# EAGLE board Lid (EAGLE 9.6.2)

Size 62.52 x 88.87 mm. Coordinates in mm from the lower left corner, seen from the top.
Copper layers (1*16): Top 0.035mm / dielectric 1.5mm / Bottom 0.035mm
Design rules "SparkFun-2-layer-TIGHT": minimum track width 7mil, minimum drill 15mil, track to track 7mil, track to pad 7mil, pad to pad 7mil, via to via 7mil, smd to smd 7mil, copper to edge 7mil, drill to drill 7mil, minimum pad ring 7mil, minimum via ring 7mil, stop-mask expansion 4mil, vias tented up to drill 25mil, thermal gap 10mil
Net classes: 0 default: width 0.178 mm; 1 vcc: width 0.203 mm

## Placement (x,y rotation side)
E$1  [CAN_DIA]  31.57,42.54 12 top
E$2  [MICRO_SERVO]  17.32,79.15 12 top
E$3  [LID_THICKNESS_060]  86.15,9.52 90 top  (outside the outline)
E$4  [CLAMP_&_HINGE]  31.54,42.55 0 top
E$5  [FLAP]  31.54,42.55 0 top
E$7  [LID_THICKNESS_060]  41.19,9.52 0 top
E$8  [LID_THICKNESS_060]  21.89,9.52 180 top
FRAME1  FRAME-LETTER  [CREATIVE_COMMONS]  24.45,-18.41 0 top  (outside the outline)

## Library data of the parts
E$1-E$5 E$7 E$8 = lid
FRAME1 = SparkFun-Aesthetics

## Text on the board
Measures: OLD radius: 1.015 / NEW: 1.018 / NEWEST: 1.021
tDocu: Pete Lewis